# Altium PCB PCB1.PcbDoc
Units mil, origin at the board's own origin, x right, y up, seen from the top; angles counter-clockwise.
Board outline 4682 x 3916 mil, 2 copper layers (Top Layer, Bottom Layer); 33 components, 30 nets, 151 pads, 14 vias.
Unrouted connection lines stored in the file: 1.
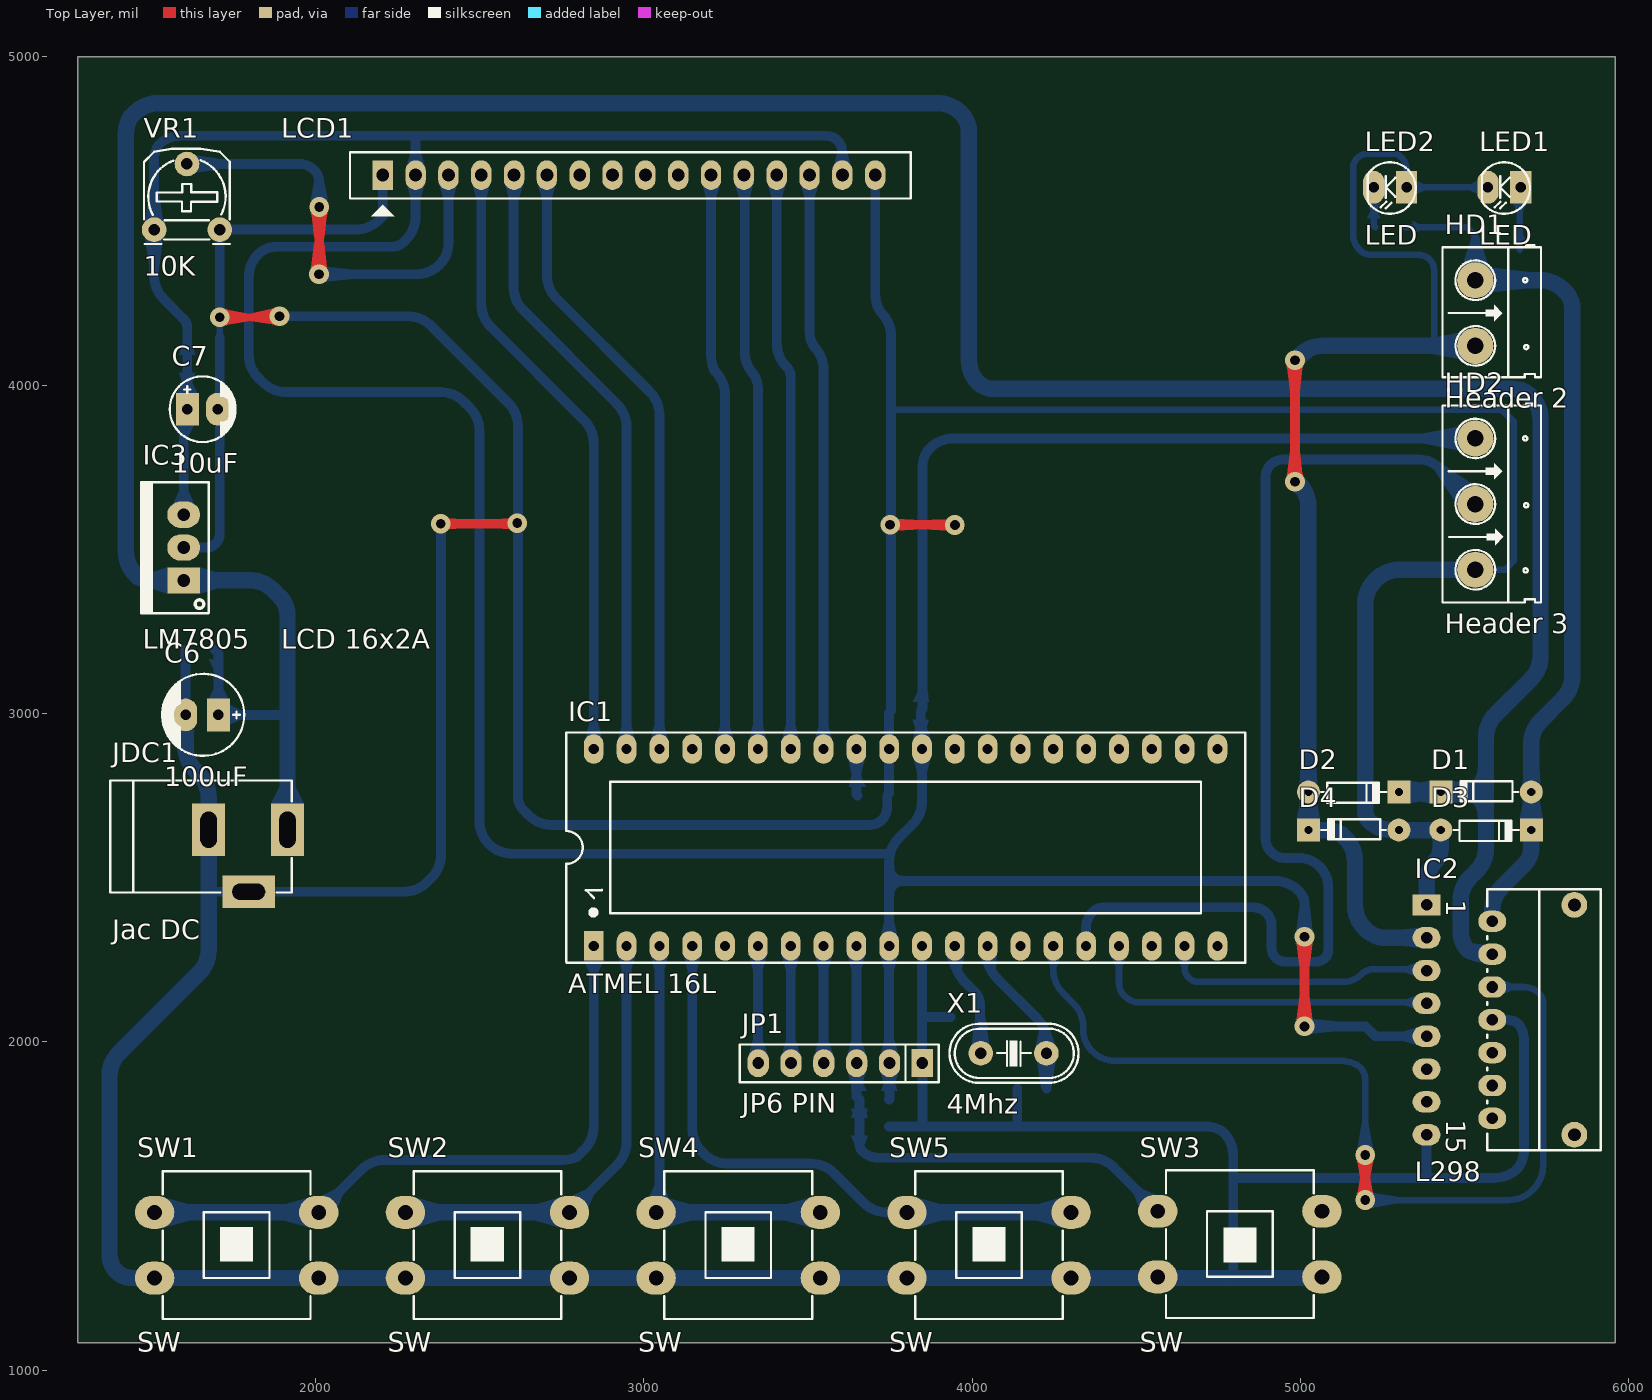
[diagram p0: Top Layer view]
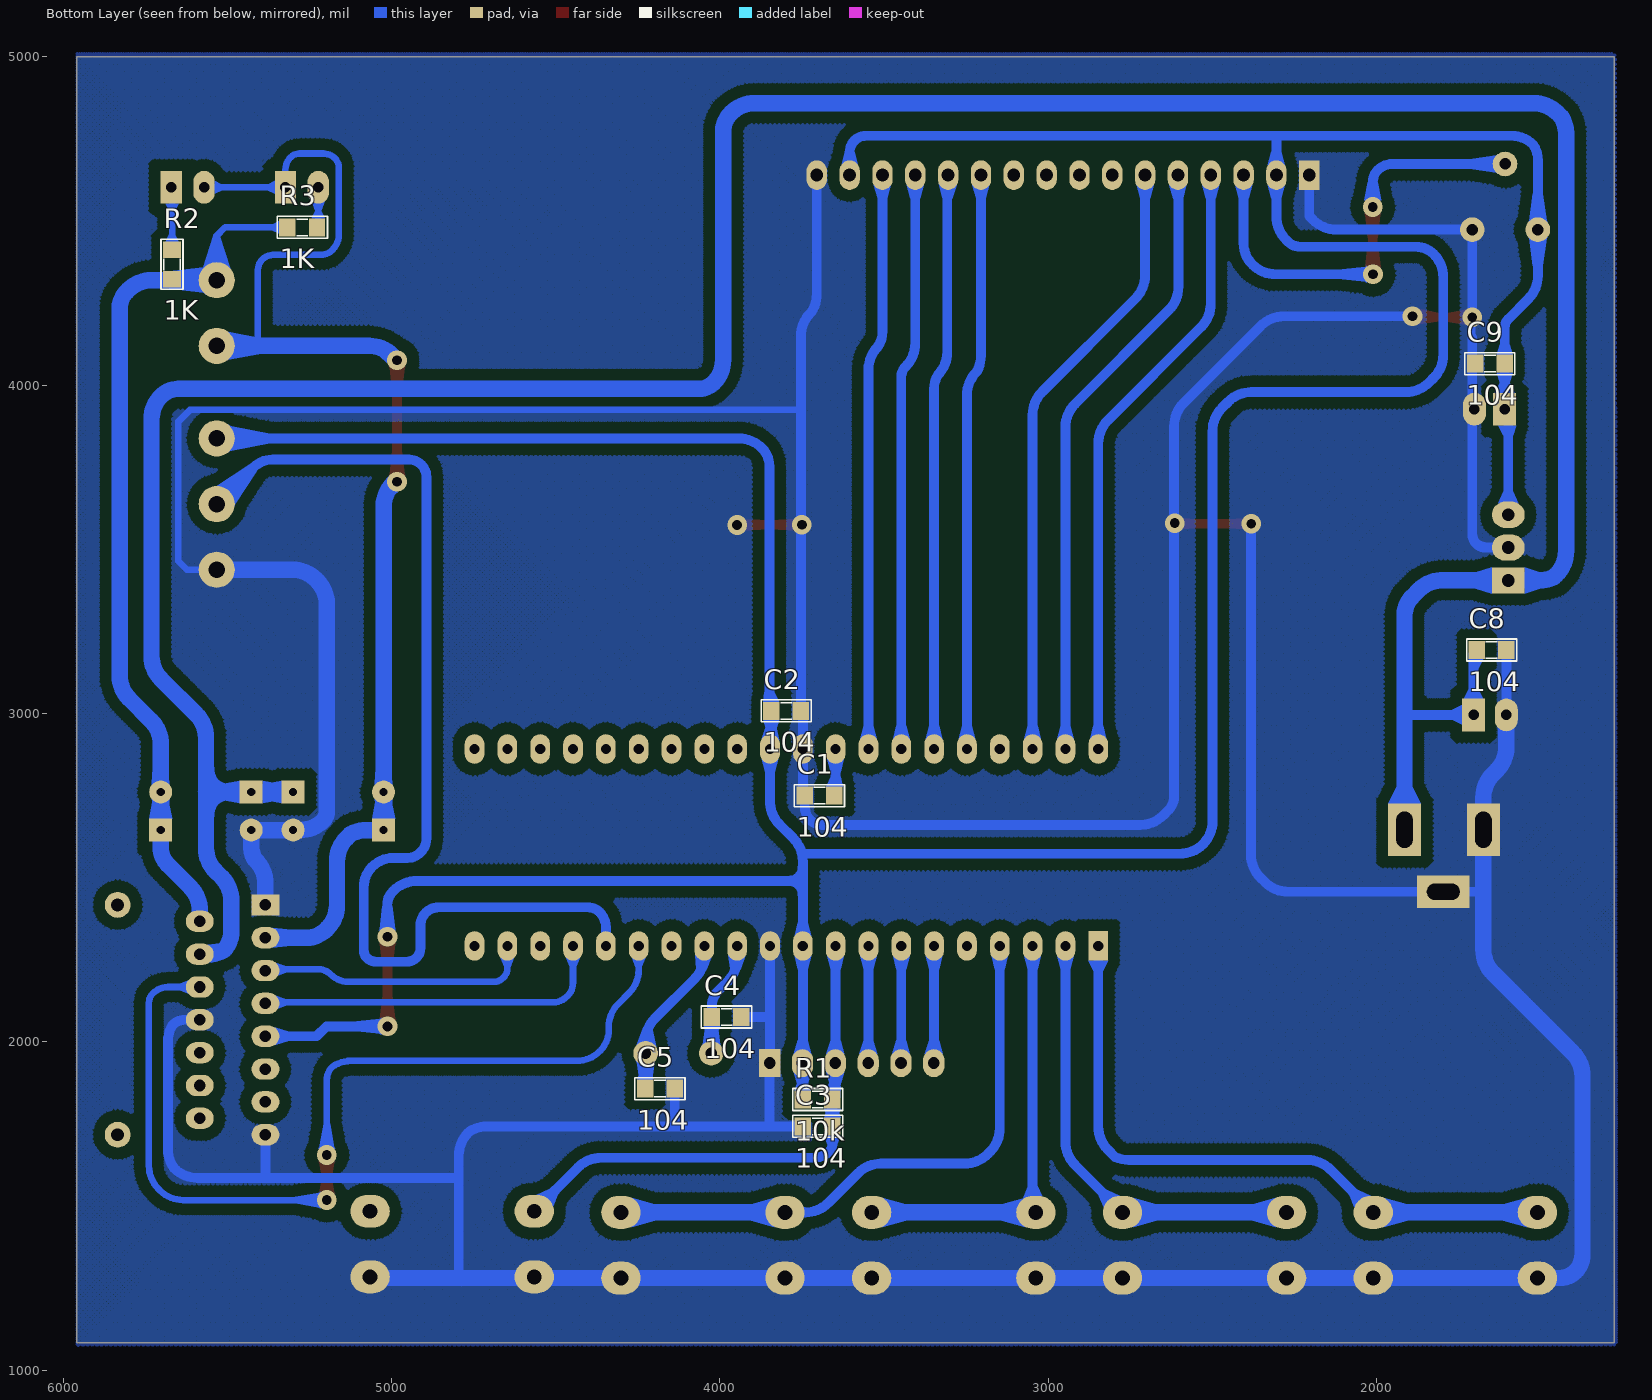
[diagram p1: Bottom Layer view, seen from below]

## Layer stack, top to bottom
Top Solder: solder mask 0.4, Solder Resist, Dk 3.5
Top Layer: signal copper 1.4
Dielectric 1: dielectric 12.6, FR-4, Dk 4.8
Bottom Layer: signal copper 1.4
Bottom Solder: solder mask 0.4, Solder Resist, Dk 3.5

## Board outline
1276,1084 5958,1084 5958,5000 1276,5000

## Design rules (kind name [scope] priority, off if disabled: settings)
Clearance Clearance_1 [InPolygon] p1: gap=35
Clearance [All] p2: gap=20
PlaneConnect [All] p1: planeconnectstyle=Direct reliefexpansion=20 reliefentries=4 reliefconductorwidth=10 reliefairgap=10
PolygonConnect [All] p1: connectstyle=Direct reliefconductorwidth=10 reliefentries=4 polygonreliefangle="90 Angle" airgapwidth=10
RoutingVias [All] p1: holewidth=28 width=50 viastyle="Through Hole" minholewidth=28 minwidth=50 maxholewidth=28 maxwidth=50
SolderMaskExpansion [All] p1: expansion=4
Width [All] p1: maxlimit=50 minlimit=10 preferedwidth=30
29 further rules are at their usual default settings.

## Components (designator, comment, footprint, x,y, rotation, side; value= is the part's Value field where it differs from the comment)
C1 "104" SM-0805 3696,2750 r180 bottom
C2 "104" SM-0805 3798,3008 r0 bottom
C3 "104" SM-0805 3702,1742 r0 bottom
C4 "104" SM-0805 3979,2076 r180 bottom
C5 "104" SM-0805 4182,1858 r180 bottom
C6 "100uF" CP1/2.5 1704,2996 r180 top
C7 "10uF" CP1/2 1609,3927 r0 top
C8 "104" SM-0805 1649,3193 r0 bottom
C9 "104" SM-0805 1654,4066 r180 bottom
D1 "" D1A 5703,2761 r180 top
D2 "" D1A 5024,2761 r0 top
D3 "" D1A 5427.41,2645 r0 top
D4 "" D1A 5299.59,2645 r180 top
HD1 "Header 2" HED2 5532.44,4320 r270 top
HD2 "Header 3" HED3 5532.44,3838 r270 top
IC1 "ATMEL 16L" DIP40/W0.6 2847,2292 r0 top
IC2 "L298" DIP15SL2 5484,2067 r270 top
IC3 "LM7805" QTO-220 1598,3405.5 r90 top
JDC1 "Jac DC" DC-IN 1674,2646 r0 top
JP1 "JP6 PIN" JP6 3848,1935 r180 top
LCD1 "LCD 16x2A" LCD16X2N 2204.43,4640 r0 top
LED1 "LED" LED-3 5621,4603 r180 top
LED2 "LED" LED-3 5273,4603 r180 top
R1 "10k" SM-0805 3702,1824 r0 bottom
R2 "1K" SM-0805 5668,4368 r270 bottom
R3 "1K" SM-0805 5272,4481 r0 bottom
SW1 "SW" SW4B 1509.5,1280.44 r0 top
SW2 "SW" SW4B 2273.4,1280.44 r0 top
SW3 "SW" SW4B 5065.09,1484 r180 top
SW4 "SW" SW4B 3037.29,1280.44 r0 top
SW5 "SW" SW4B 3801.19,1280.44 r0 top
VR1 "10K" VR 1508,4474.01 r0 top
X1 "4Mhz" XT2 4126,1965 r180 top

## Footprints (in the part's own frame and the unit in brackets; to place one, negate y for a bottom-side part, rotate by r counter-clockwise, add the part's x,y. Pads: shape width x height; smd on the part's side, far side on the other; paste and mask are expansions set on the pad)
CP1/2 [mil] "Tu hoa < 22uF/16>50V"
  rect 70x100 hole 32: 1(0,0)
  oval 70x100 hole 32: 2(92.13,0)
  silkscreen extent -53,-100 147,100, body extent -49,-99 149,99, height 287
CP1/2.5 [mil] "Tu hoa 33 >100 uF,50V, 220uF/16V,25V"
  rect 70x100 hole 32: 1(0,0)
  oval 70x100 hole 32: 2(100,0)
  silkscreen extent -78,-125 172,125, body extent -76,-124 172,124, height 422
D1A [mil] "Diode 1A, W 100mil, L 350mil"
  round 70 hole 25: 1(0,0)
  rect 70x70 hole 25: 2(275.59,0)
  silkscreen extent 39,-35 237,28
DC-IN [mil] "Jac DC input"
  rect 100x160 hole 50 slot 110.24 at 90 deg: 1(240.16,0) 2(0,0)
  rect 160x100 hole 50 slot 100 at 0 deg: 3(122.05,-188.98)
  silkscreen extent -300,-191 253,150, body extent -299,-198 245,176, height 434
DIP15SL2 [mil] "TO, Thru-Hole, Vertical, Heatsink Mounted; 15 Bent Staggered Leads; Pitch 1.27 mm"
  round 78.74 hole 39.37: 0(-350,350) 0(350,350)
  rect 65x85 hole 35.43: 1(-350,-100)
  oval 65x85 hole 35.43: 2(-300,100) 3(-250,-100) 4(-200,100) 5(-150,-100) 6(-100,100) 7(-50,-100) 8(0,100) 9(50,-100) 10(100,100) 11(150,-100) 12(200,100) 13(250,-100) 14(300,100) 15(350,-100)
  silkscreen extent -398,84 398,431, body extent -382,-110 390,247, height 895
DIP40/W0.6 [mil] "40 PIN, W 600mil, Pin to pin 100mil"
  rect 60x90 hole 31: 1(0,0)
  oval 60x90 hole 31: 2(100,0) 3(200,0) 4(300,0) 5(400,0) 6(500,0) 7(600,0) 8(700,0) 9(800,0) 10(900,0) 11(1000,0) 12(1100,0) 13(1200,0) 14(1300,0) 15(1400,0) 16(1500,0) 17(1600,0) 18(1700,0) 19(1800,0) 20(1900,0) 21(1900,600) 22(1800,600) 23(1700,600) 24(1600,600) 25(1500,600) 26(1400,600) 27(1300,600) 28(1200,600) 29(1100,600) 30(1000,600) 31(900,600) 32(800,600) 33(700,600) 34(600,600) 35(500,600) 36(400,600) 37(300,600) 38(200,600) 39(100,600) 40(0,600)
  silkscreen extent -84,-51 1985,650, body extent -80,-47 1977,646, height 327
HED2 [mil] "Header 2, 2 pin, hight 300mil, Pin to Pin 200, Colour Green"
  round 110 hole 50: 1(0,0) 2(200,0)
  silkscreen extent -106,-100 296,200, body extent -97,-100 297,195, height 404
HED3 [mil] "Header 3, 3 pin, hight 300mil, Pin to Pin 200, Colour Green"
  round 110 hole 50: 1(0,0) 2(200,0) 3(400,0)
  silkscreen extent -106,-100 500,200, body extent -97,-100 498,195, height 404
JP6 [mil] "JP6"
  rect 65x85 hole 36: 1(0,0)
  oval 65x85 hole 36: 2(100,0) 3(200,0) 4(300,0) 5(400,0) 6(500,0)
  silkscreen extent -50,-57 556,58, body extent -48,-50 548,48, height 323
LCD16X2N [mil] "LCD dipslay 16x2, 16 pin"
  rect 62x90 hole 39: 1(0,0)
  oval 62x90 hole 39: 2(100,0) 3(200,0) 4(300,0) 5(400,0) 6(500,0) 7(600,0) 8(700,0) 9(800,0) 10(900,0) 11(1000,0) 12(1100,0) 13(1200,0) 14(1300,0) 15(1400,0) 16(1500,0)
  silkscreen extent -100,-125 1608,70, body extent -320,-1353 2850,84, height 764
LED-3 [mil] "LED 2 PIN, 3ly Only colour"
  rect 65x100 hole 32: 1(-50,0)
  oval 65x100 hole 32: 2(50,0)
  silkscreen extent -78,-76 69,81, body extent -62,-75 76,75, height 217
QTO-220 [mil] "TO-220 - 1-2-3"
  rect 80x100 hole 39: 1(0,0)
  oval 80x100 hole 39: 2(100,0) 3(200,0)
  silkscreen extent -100,-76 300,130, body extent -119,-64 322,121, height 755
SM-0805 [mil] "Compoment SMD 80x50mil"
  rect 50x55 smd: 1(-45,0) 2(45,0)
  silkscreen extent -77,-34 76,33, body extent -40,-27 40,23, height 24
SW4B [mil] "SW button 4pin, 450 x 450 mil"
  oval 120x100 hole 45: 1(0,200) 2(500,0) 3(500,200) 4(0,0)
  silkscreen extent 25,-125 475,325, body extent 15,-134 487,338, height 57
VR [mil] "Resistor Variable"
  round 75 hole 35: 1(0,0) 2(100,200) 3(200,0)
  silkscreen extent -31,-44 231,246, body extent -28,-51 228,227, height 293
XT2 [mil] "Footpin for Crystal 2 pin"
  round 75 hole 34: 1(-100,0) 2(100,0)
  silkscreen extent -198,-90 195,90, body extent -233,-93 213,90, height 138

## Part data
C1 C2 C3 C4 C5 C8 C9: library part CM, "Cap SMD"
C6: library part CP2, "C 47uF/50V , 220uF/16V"
C7: library part CP1, "Cap P  0,1uF < 22uF , 16 - 50V"
D1 D2 D3 D4: library part D1A, "Diode 1A"
HD1: library part Hed2, "Connecter 2 (Green)"
HD2: library part Hed3, "Header 3 (Green)"
IC1: library part Atmega16L, "8-Bit AVR Microcontroller with 16K Bytes of In-System Programmable Flash Memory"
IC2: "Dual Full-H Driver"
IC3: library part LM78xx, "On ap +, from + 5 to + 24VDC"
JDC1: library part DCIN, "Jac DC input"
JP1: library part JP6
LCD1: library part LCD16x2A, "LCD dipslay 16 char, 2 line"
LED1 LED2: "LED Single colour Green and Red"
R1 R2 R3: library part RM, "Resistor SMD"
SW1 SW2 SW3 SW4 SW5: library part SW4-1, "Switch button 4 pin"
VR1: library part VR1, "Var Resistor"
X1: library part XT2, "Crystal For all Crystal 2pin."

## Via types
v1: diameter 60, hole 30, Top Layer to Bottom Layer, 14 vias

## Nets (pads, with @x,y where several pads share a name; then routed paths per layer and width w, separated by ;. In a path a pad name is that pad's centre, name@x,y a point inside that pad or via, vN(x,y) a via of type N, cw(c..) or ccw(c..) an arc to the next point about the centre after c; other vN are vias at no path point)
12V: C6.1 C8.2 D1.2 D2.2 IC2.4 IC3.1 JDC1.1 | length 10199.9
  Bottom Layer w30: C8.2@1693,3193 1704,3182 C6.1 1912.16,2996 1914.16,2998
  Bottom Layer w50: JDC1.1 1914.16,2998 1914.16,3300.09 ccw(c1835.09,3300.09) 1891,3356 1870.79,3376.21 ccw(c1800.08,3305.5) 1804.08,3405.42 ccw(c1800.08,3305.5) 1800.08,3405.5 IC3.1 1502.92,3405.5 cw(c1502.92,3505.5) 1459.31,3415.51 1451.29,3423.53 cw(c1522,3494.24) 1422,3494.24 1422,4765.58 cw(c1522,4765.58) 1422.06,4769.06 cw(c1522,4765.58) 1435.76,4816.2 1449.27,4829.71 cw(c1519.98,4759) 1519.98,4859 3894.58,4859 cw(c3894.58,4759) 3965.29,4829.71 3967,4828 cw(c3911.47,4772.47) 3990,4772.47 3990,4075.6 ccw(c4085.6,4075.6) 4018,4008 ccw(c4063.87,4053.87) 4063.87,3989 5649.3,3989 cw(c5649.3,3914.88) 5701.71,3967.29 cw(c5631,3896.58) 5731,3896.58 5731,3175.27 cw(c5631,3175.27) 5701.71,3104.56 5594.29,2997.14 ccw(c5665,2926.43) 5565,2926.43 5565,2761 ; D2.2 D1.2 5565,2761 ; IC2.4 5558.01,2267 cw(c5558.01,2366.01) 5511.46,2278.62 cw(c5568.11,2335.27) 5488,2335.27 5488,2430.58 cw(c5588,2430.58) 5517.29,2501.29 5535.71,2519.71 ccw(c5465,2590.42) 5565,2590.42 5565,2761
A: IC1.19 IC2.5 | length 840.2
  Bottom Layer w20: IC1.19 4647,2223.97 ccw(c4687.97,2223.97) 4659,2195 ccw(c4687.97,2223.97) 4687.97,2183 5130.47,2183 ccw(c5130.47,2261.53) 5186,2206 cw(c5222.21,2169.79) 5222.21,2221 5380,2221 IC2.5
B: IC1.17 IC2.7 | length 1083.4
  Bottom Layer w20: IC1.17 4447,2180.04 ccw(c4505.04,2180.04) 4463.97,2139.03 ; 4464,2139 ccw(c4508.66,2183.66) 4508.66,2120.5 5375.55,2120.5 cw(c5375.55,2108.55) IC2.7
DAO: IC1.3 SW4.1 SW4.3 | length 1315.6
  Bottom Layer w30: SW4.1 3047,1490.15 IC1.3
  Bottom Layer w50: SW4.1 SW4.3
EN: IC1.15 IC2.6 | length 2873.2
  Top Layer w20: v1@5193,1518 5197,1522 v1(5197,1655)
  Bottom Layer w20: IC1.15 4247,2219.42 ccw(c4347,2219.42) 4276.29,2148.71 4308.88,2116.12 cw(c4238.17,2045.41) 4338.17,2045.41 4338.17,2036.85 ccw(c4430.89,2036.85) 4365.33,1971.29 ccw(c4436.04,2042) 4436.04,1942 5123.36,1942 cw(c5123.36,1843.08) 5180.28,1923.98 cw(c5139.92,1883.62) 5197,1883.62 v1(5197,1655) ; v1(5197,1518) 5634.58,1518 ccw(c5634.58,1618) 5705.29,1547.29 5709.71,1551.71 ccw(c5639,1622.42) 5739,1622.42 5739,2119.25 ccw(c5699.61,2119.25) 5727.46,2147.1 ccw(c5679.42,2099.06) 5679.42,2167 IC2.6
ENCODER: HD2.2 IC1.16 | length 3264.4
  Bottom Layer w30: IC1.16 4347,2349.84 cw(c4410.16,2349.84) 4365.5,2394.5 cw(c4402.92,2357.08) 4402.92,2410 4855.67,2410 cw(c4855.67,2353.67) 4895.48,2393.52 cw(c4855.67,2353.67) 4912,2353.67 4912,2284.97 ccw(c4952.97,2284.97) 4924,2256 ccw(c4952.97,2284.97) 4952.97,2244 5046.5,2244 ccw(c5046.5,2284.83) 5075.37,2255.96 ccw(c5053.34,2277.99) 5084.5,2277.99 5084.5,2470.38 ccw(c4994.88,2470.38) 5058.26,2533.74 ccw(c4994.88,2470.38) 4994.88,2560 4952,2560 cw(c4952,2615.53) 4912.74,2576.26 4910.5,2578.5 ; 4910.47,2578.53 cw(c4951.54,2619.54) 4893.5,2619.54 4893.5,3720.58 cw(c4946.42,3720.58) 4908.99,3757.99 cw(c4946.42,3720.58) 4946.42,3773.5 5361.89,3773.5 cw(c5361.89,3688.89) 5421.68,3748.75 ; 5421.72,3748.72 HD2.2
GIAM: IC1.2 SW2.1 SW2.3 | length 1379.2
  Bottom Layer w30: SW2.3 2917.71,1624.76 ccw(c2847,1695.47) 2947,1695.47 IC1.2
  Bottom Layer w50: SW2.1 SW2.3
GND: C1.1 C2.1 C3.2 C4.2 C5.2 C6.2 C7.2 C8.1 C9.1 D3.1 D4.1 HD2.3 IC1.11 IC1.31 IC2.1 IC2.8 IC2.15 IC3.2 JDC1.2 JDC1.3 JP1.1 LCD1.1 LCD1.16 SW1.2 SW1.4 SW2.2 SW2.4 SW3.1 SW3.3 SW4.2 SW4.4 SW5.2 SW5.4 VR1.3 | length 22736.1
  Top Layer w20: v1(1708,4207) 1887,4207 v1(1890,4210)
  Top Layer w30: v1(2381,3578) 2609.17,3578 ccw(c2609.17,3584.83) v1(2614,3580) ; v1(3750,3575) 3946,3575 v1(3947,3574)
  Bottom Layer w20: 1708,4146 v1(1708,4207) ; 3753,3925 5614,3925 5649,3890 5649,3464 5623,3438 HD2.3 ; IC2.15 IC2.15@5386,1715
  Bottom Layer w30: IC3.2 1656.1,3505.5 ; C6.2 C8.1 ; 1674,2469 1685.98,2457.02 JDC1.3 2268.6,2457.02 ccw(c2268.6,2557.02) 2339.31,2486.31 2352.71,2499.71 ccw(c2282,2570.42) 2382,2570.42 2382,3575.59 ccw(c2378.59,3575.59) v1(2381,3578) ; JDC1.2@1674,2611 JDC1.2 ; 1708,4146 1708,3547.67 cw(c1664.32,3547.67) 1703.39,3528.14 cw(c1664.32,3547.67) 1695.21,3516.79 ; v1(1708,4207) VR1.3 2121.59,4474.01 ccw(c2121.59,4574.01) 2192.3,4503.3 2204.43,4515.43 LCD1.1 ; v1(1890,4210) 2281.58,4210 cw(c2281.58,4110) 2352.29,4180.71 2586.71,3946.29 cw(c2516,3875.58) 2616,3875.58 2616,2747.04 ccw(c2674.04,2747.04) 2633,2706 2648.86,2690.14 ccw(c2719.57,2760.86) 2694.69,2664 ccw(c2719.57,2760.86) 2719.57,2660.86 3689.33,2660.86 ccw(c3689.33,2710.37) 3724.35,2675.36 ccw(c3684.15,2715.56) 3741,2715.56 C1.1 3747,2756 IC1.31 3747,3002 C2.1 3753,3925 3753,4149.54 ccw(c3653,4149.54) 3736.62,4204.38 ; LCD1.16 3704.43,4277.99 ccw(c3804.43,4277.99) 3720.81,4223.15 3723.71,4220.25 cw(c3653,4149.54) 3736.62,4204.38 ; 3733.72,4207.28 3736.62,4204.38 ; C3.2 4136,1742 ; IC1.11 3847,2077 ; 3848,1757 3848,1859 ; 3849,1858 3848,1859 ; C4.2 3848,2076 3847,2077 ; C5.2 4137,1743 4136,1742 ; 4786,1280.44 4795,1289.44 4795,1653 ccw(c4695,1653) 4765.71,1723.72 4762.71,1726.72 ccw(c4709.58,1642) 4709.58,1742 4136,1742 ; 4803.5,1585.5 5591.13,1585.5 ccw(c5591.13,1685.5) 5661.84,1614.79 5663.11,1616.06 ccw(c5581,1673.14) 5681,1673.14 5681,2001.82 ccw(c5588.82,2001.82) 5666.56,2051.36 ccw(c5628.79,2013.59) 5628.79,2067 IC2.8 ; 5384,1587 IC2.15 ; 1656.1,3505.5 ccw(c1656.1,3578.9) 1695.21,3516.79 ; 1656.1,3505.5 1667.96,3505.5 ccw(c1667.96,3544.04) 1695.21,3516.79 ; 3847,2077 3847,1936 JP1.1 3848,1859
  Bottom Layer w50: C6.2 1604,2897.42 ccw(c1704,2897.42) 1633.29,2826.71 1644.71,2815.29 cw(c1574,2744.58) 1674,2744.58 JDC1.2 ; JDC1.2@1674,2611 1674,2469 1674,2280.03 cw(c1574,2280.03) 1644.71,2209.32 1401.29,1965.9 ccw(c1472,1895.19) 1372,1895.19 1372,1353.11 ccw(c1447.11,1353.11) 1394,1300 ccw(c1441.22,1347.22) 1441.22,1280.44 SW1.4 SW1.2 SW2.4 SW2.2 SW4.4 SW4.2 SW5.4 SW5.2 4786,1280.44 5061.53,1280.44 SW3.1 ; IC2.1 5384,2482.08 cw(c5484,2482.08) 5393.39,2524.39 cw(c5484,2482.08) 5413.29,2552.79 5418.02,2557.52 ccw(c5327.41,2599.83) 5427.41,2599.83 D3.1 D4.1 5278.35,2645 cw(c5278.35,2745) 5207.63,2674.29 cw(c5233.31,2699.96) 5197,2699.96 5197,3333.58 cw(c5297,3333.58) 5226.29,3404.29 5230.71,3408.71 cw(c5301.42,3338) 5301.42,3438 HD2.3
MISO: IC1.7 JP1.5 | length 357.4
  Bottom Layer w30: IC1.7 3447,1936 JP1.5
MOSI: IC1.6 JP1.6 | length 357.4
  Bottom Layer w30: IC1.6 3347,1936 JP1.6
NetC1_2: C1.2 IC1.32 | length 143.7
  Bottom Layer w30: IC1.32 3647,2754 C1.2
NetD1_1: D1.1 D3.2 HD1.1 IC2.2 R2.2 R3.2 | length 2655.3
  Bottom Layer w20: R3.2 5507,4481 5533,4455 5533,4320.56 HD1.1
  Bottom Layer w50: HD1.1 5730.58,4320 cw(c5730.58,4220) 5801.29,4290.71 5807,4285 cw(c5756.3,4234.3) 5828,4234.3 5828,3115.42 cw(c5728,3115.42) 5798.71,3044.71 5732.29,2978.29 ccw(c5803,2907.58) 5703,2907.58 D1.1 D3.2 5703,2592.11 cw(c5627.89,2592.11) 5681,2539 5613.29,2471.29 ccw(c5684,2400.58) 5584,2400.58 IC2.2
NetD2_1: D2.1 D4.2 HD1.2 IC2.3 LED1.2 LED2.1 | length 3875.1
  Top Layer w30: v1(4983,3706) v1(4983,4076)
  Bottom Layer w20: 5405,4120 5407,4122 5407,4350.91 ccw(c5360.91,4350.91) 5393.5,4383.5 ccw(c5360.91,4350.91) 5360.91,4397 5215.51,4397 cw(c5215.51,4446.51) 5180.5,4411.5 cw(c5228.78,4459.78) 5160.5,4459.78 5160.5,4663.24 cw(c5199.76,4663.24) 5172,4691 cw(c5208.21,4654.79) 5208.21,4706 5279.74,4706 cw(c5279.74,4666.74) 5307.5,4694.5 cw(c5270.08,4657.08) 5323,4657.08 LED2.1 LED1.2
  Bottom Layer w50: v1@4982,4075 v1(4983,4076) 4997.71,4090.71 cw(c5068.42,4020) 5068.42,4120 5405,4120 HD1.2 ; v1@4990,3706 4994.71,3701.29 cw(c4924,3630.58) 5024,3630.58 D2.1 D4.2 5075.58,2645 cw(c5075.58,2545) 5125.4,2631.7 5136.71,2620.4 cw(c5066,2549.69) 5166,2549.69 5166,2416.42 ccw(c5266,2416.42) 5195.29,2345.71 5199,2342 ccw(c5259.36,2402.36) 5259.36,2317 IC2.3
NetIC1_33: IC1.33 LCD1.14 | length 1771.6
  Bottom Layer w30: LCD1.14 3504.43,4162.6 ccw(c3583.21,4162.6) 3518.96,4117.01 ; IC1.33 3547,4047.58 ccw(c3447,4047.58) 3527.51,4106.9 ; 3518.96,4117.01 cw(c3447,4047.58) 3527.51,4106.9 ; 3518.96,4117.01 ccw(c3583.21,4162.6) 3527.51,4106.9
NetIC1_34: IC1.34 LCD1.13 | length 1759.4
  Bottom Layer w30: LCD1.13 3404.43,4127.99 ccw(c3504.43,4127.99) 3433.72,4057.28 ; 3433.75,4057.25 cw(c3401.66,4025.22) 3447,4025.22 IC1.34
NetIC1_35: IC1.35 LCD1.12 | length 1775.7
  Bottom Layer w30: LCD1.12 3307,4637.43 3307,4101.42 ccw(c3407,4101.42) 3323.99,4045.66 ; IC1.35 3347,3990.11 ccw(c3268.43,3990.11) 3334.66,4032.38 ; 3323.99,4045.66 ccw(c3407,4101.42) 3334.66,4032.38 ; 3323.99,4045.66 cw(c3268.43,3990.11) 3334.66,4032.38
NetIC1_36: IC1.36 LCD1.11 | length 1758.3
  Bottom Layer w30: LCD1.11 3204.43,4089.99 ccw(c3304.43,4089.99) 3216.81,4041.8 3217.71,4040.9 cw(c3147,3970.19) 3234.66,4018.32 cw(c3147,3970.19) 3247,3970.19 IC1.36
NetIC1_38: IC1.38 LCD1.6 | length 1881.3
  Bottom Layer w30: LCD1.6 2704.43,4334.99 ccw(c2804.43,4334.99) 2733.72,4264.28 3017.71,3980.29 cw(c2947,3909.58) 3047,3909.58 IC1.38
NetIC1_39: IC1.39 LCD1.5 | length 1882.5
  Bottom Layer w30: LCD1.5 2603,4638.57 2603,4299.42 ccw(c2703,4299.42) 2632.29,4228.71 2917.71,3943.29 cw(c2847,3872.58) 2947,3872.58 IC1.39
NetIC1_40: IC1.40 LCD1.4 | length 1881.3
  Bottom Layer w30: LCD1.4 2504.43,4247.99 ccw(c2604.43,4247.99) 2533.72,4177.28 2817.71,3893.29 cw(c2747,3822.58) 2847,3822.58 IC1.40
NetLCD1_3: LCD1.3 VR1.2 | length 1369.6
  Top Layer w30: v1(2010,4338) 2011,4339 v1(2011,4543)
  Bottom Layer w30: VR1.2 1950.81,4674.01 cw(c1950.81,4610.81) 1995.5,4655.5 cw(c1958.08,4618.08) 2011,4618.08 v1(2011,4543) ; v1(2010,4338) 2306.58,4338 ccw(c2306.58,4438) 2377.29,4367.29 ccw(c2311.76,4432.82) 2404.43,4432.82 LCD1.3
NetLED1_1: LED1.1 R2.1 | length 191.2
  Bottom Layer w20: R2.1 5668,4600 LED1.1
NetLED2_2: LED2.2 R3.1 | length 123.7
  Bottom Layer w20: LED2.2 5223,4485 R3.1
RST: C3.1 IC1.9 JP1.3 R1.1 SW3.2 SW3.4 | length 1599.7
  Bottom Layer w30: IC1.9 3647,1936 JP1.3 3648,1833 R1.1 C3.1 3657,1687.57 ccw(c3686.46,1687.57) 3665.63,1666.74 ccw(c3713.28,1714.39) 3713.28,1647 4360.66,1647 cw(c4360.66,1547) 4431.38,1617.71 SW3.2
SCK: IC1.8 JP1.4 | length 357.4
  Bottom Layer w30: IC1.8 3547,1936 JP1.4
STOP: IC1.4 SW5.1 SW5.3 | length 1822.9
  Bottom Layer w30: IC1.4 3147,1736.42 ccw(c3247,1736.42) 3176.29,1665.71 3183.71,1658.29 ccw(c3254.42,1729) 3254.42,1629 3508.58,1629 cw(c3508.58,1529) 3579.29,1599.71 3669.27,1509.73 ccw(c3739.98,1580.44) 3739.98,1480.44 SW5.1
  Bottom Layer w50: SW5.1 SW5.3
TANG: IC1.1 SW1.1 SW1.3 | length 2009
  Bottom Layer w30: SW1.3 2139.77,1610.71 cw(c2210.48,1540) 2210.48,1640 2753.58,1640 ccw(c2753.58,1740) 2795.63,1649.27 2817.71,1671.35 ccw(c2747,1742.06) 2847,1742.06 IC1.1
  Bottom Layer w50: SW1.1 SW1.3
VCC: C2.2 C7.1 C9.2 HD2.1 IC1.10 IC1.30 IC2.9 IC3.3 JP1.2 LCD1.2 LCD1.15 R1.2 VR1.1 | length 13532.9
  Top Layer w30: v1@5000,2320 5012,2308 v1(5012,2047)
  Bottom Layer w30: IC3.3 1598,3933 ccw(c1571.44,3959.56) 1609,3959.56 C9.2 1609,4175.44 ccw(c1571.44,4175.44) 1598,4202 1537.29,4262.71 cw(c1608,4333.42) 1508,4333.42 VR1.1 1508,4685.64 cw(c1593.36,4685.64) 1521.97,4732.43 cw(c1588.52,4665.88) 1588.52,4760 3554.47,4760 cw(c3554.47,4710.42) 3589.46,4745.54 ; 2304.43,4746 LCD1.2 2304.43,4513.85 cw(c2204.43,4513.85) 2304.04,4505.04 cw(c2204.43,4513.85) 2275.14,4443.14 2268.99,4436.99 cw(c2232.79,4473.21) 2232.79,4422 1880.12,4422 ccw(c1880.12,4344.46) 1825.29,4399.29 ccw(c1896,4328.58) 1796,4328.58 1796,4093.42 ccw(c1896,4093.42) 1825.29,4022.71 1839.71,4008.29 ccw(c1910.42,4079) 1910.42,3979 2380.58,3979 cw(c2380.58,3879) 2451.29,3949.71 2469.71,3931.29 cw(c2399,3860.58) 2499,3860.58 2499,2671.6 ccw(c2597.02,2671.6) 2527.71,2602.29 ccw(c2598.42,2673) 2598.42,2573 3747,2573 ; 3589.52,4745.48 cw(c3553.52,4709.48) 3589.56,4745.44 cw(c3553.52,4709.48) 3604.43,4709.48 LCD1.15 ; R1.2 3748,1825 JP1.2 3747,1936 IC1.10 3747,2490 ; 4996,2458 4993.29,2460.71 ccw(c4922.58,2390) 4922.58,2490 3747,2490 ; 4996.03,2457.97 cw(c4954.96,2416.96) 5013,2416.96 5013,2333 v1@5000,2320 ; v1(5012,2047) 5198,2047 5228,2017 IC2.9 ; HD2.1 3942.42,3838 ccw(c3942.42,3738) 3871.71,3808.71 ccw(c3926.54,3753.88) 3849,3753.88 3849,3014 C2.2 3843,2896 IC1.30 3847,2732.42 cw(c3747,2732.42) 3844.29,2709.29 cw(c3747,2732.42) 3817.71,2661.71 3776.29,2620.29 ccw(c3847,2549.58) 3747,2549.58 3747,2490
  other v1: 5012,2320
XTAL1: C5.1 IC1.13 X1.1 | length 500
  Bottom Layer w30: IC1.13 4047,2263.01 ccw(c4146.01,2263.01) 4076,2193 4196.71,2072.29 cw(c4126,2001.58) 4226,2001.58 X1.1 4226,1859 C5.1
XTAL2: C4.1 IC1.12 X1.2 | length 352.7
  Bottom Layer w30: IC1.12 3947,2254.42 ccw(c4047,2254.42) 3976.29,2183.71 4005.62,2154.38 ; 4005.64,2154.36 cw(c3961.23,2110) 4024,2110 C4.1 4024,1967 X1.2
pads on no net: IC1.5 IC1.14 IC1.18 IC1.20 IC1.21 IC1.22 IC1.23 IC1.24 IC1.25 IC1.26 IC1.27 IC1.28 IC1.29 IC1.37 IC2.0 IC2.10 IC2.11 IC2.12 IC2.13 IC2.14 LCD1.7 LCD1.8 LCD1.9 LCD1.10

## Polygon pours and split planes (outlines as drawn)
GND on Bottom Layer "Drill Drawing-No Net" (hatched 45Degree grid 10 track 10, remove dead copper, pour order 0): 1272,5004 1278,5010 5958,5010 5958,1071 5962,1067 5952,1077 1269,1077

## Text inside footprints (layer, text, board x,y; h text height)
IC2: Top Overlay "15" at 5444,1762 h59.06 r270; Top Overlay "1" at 5444,2432 h59.06 r270